# Altium PCB 主板-0909.PcbDoc (part 5 of 5)
Units mm, origin at the board's own origin, x right, y up, seen from the top; angles counter-clockwise.
Board outline 97.69 x 103.45 mm, 2 copper layers (Top Layer, Bottom Layer); 76 components, 70 nets, 245 pads, 271 vias.
Unrouted connection lines stored in the file: 5.
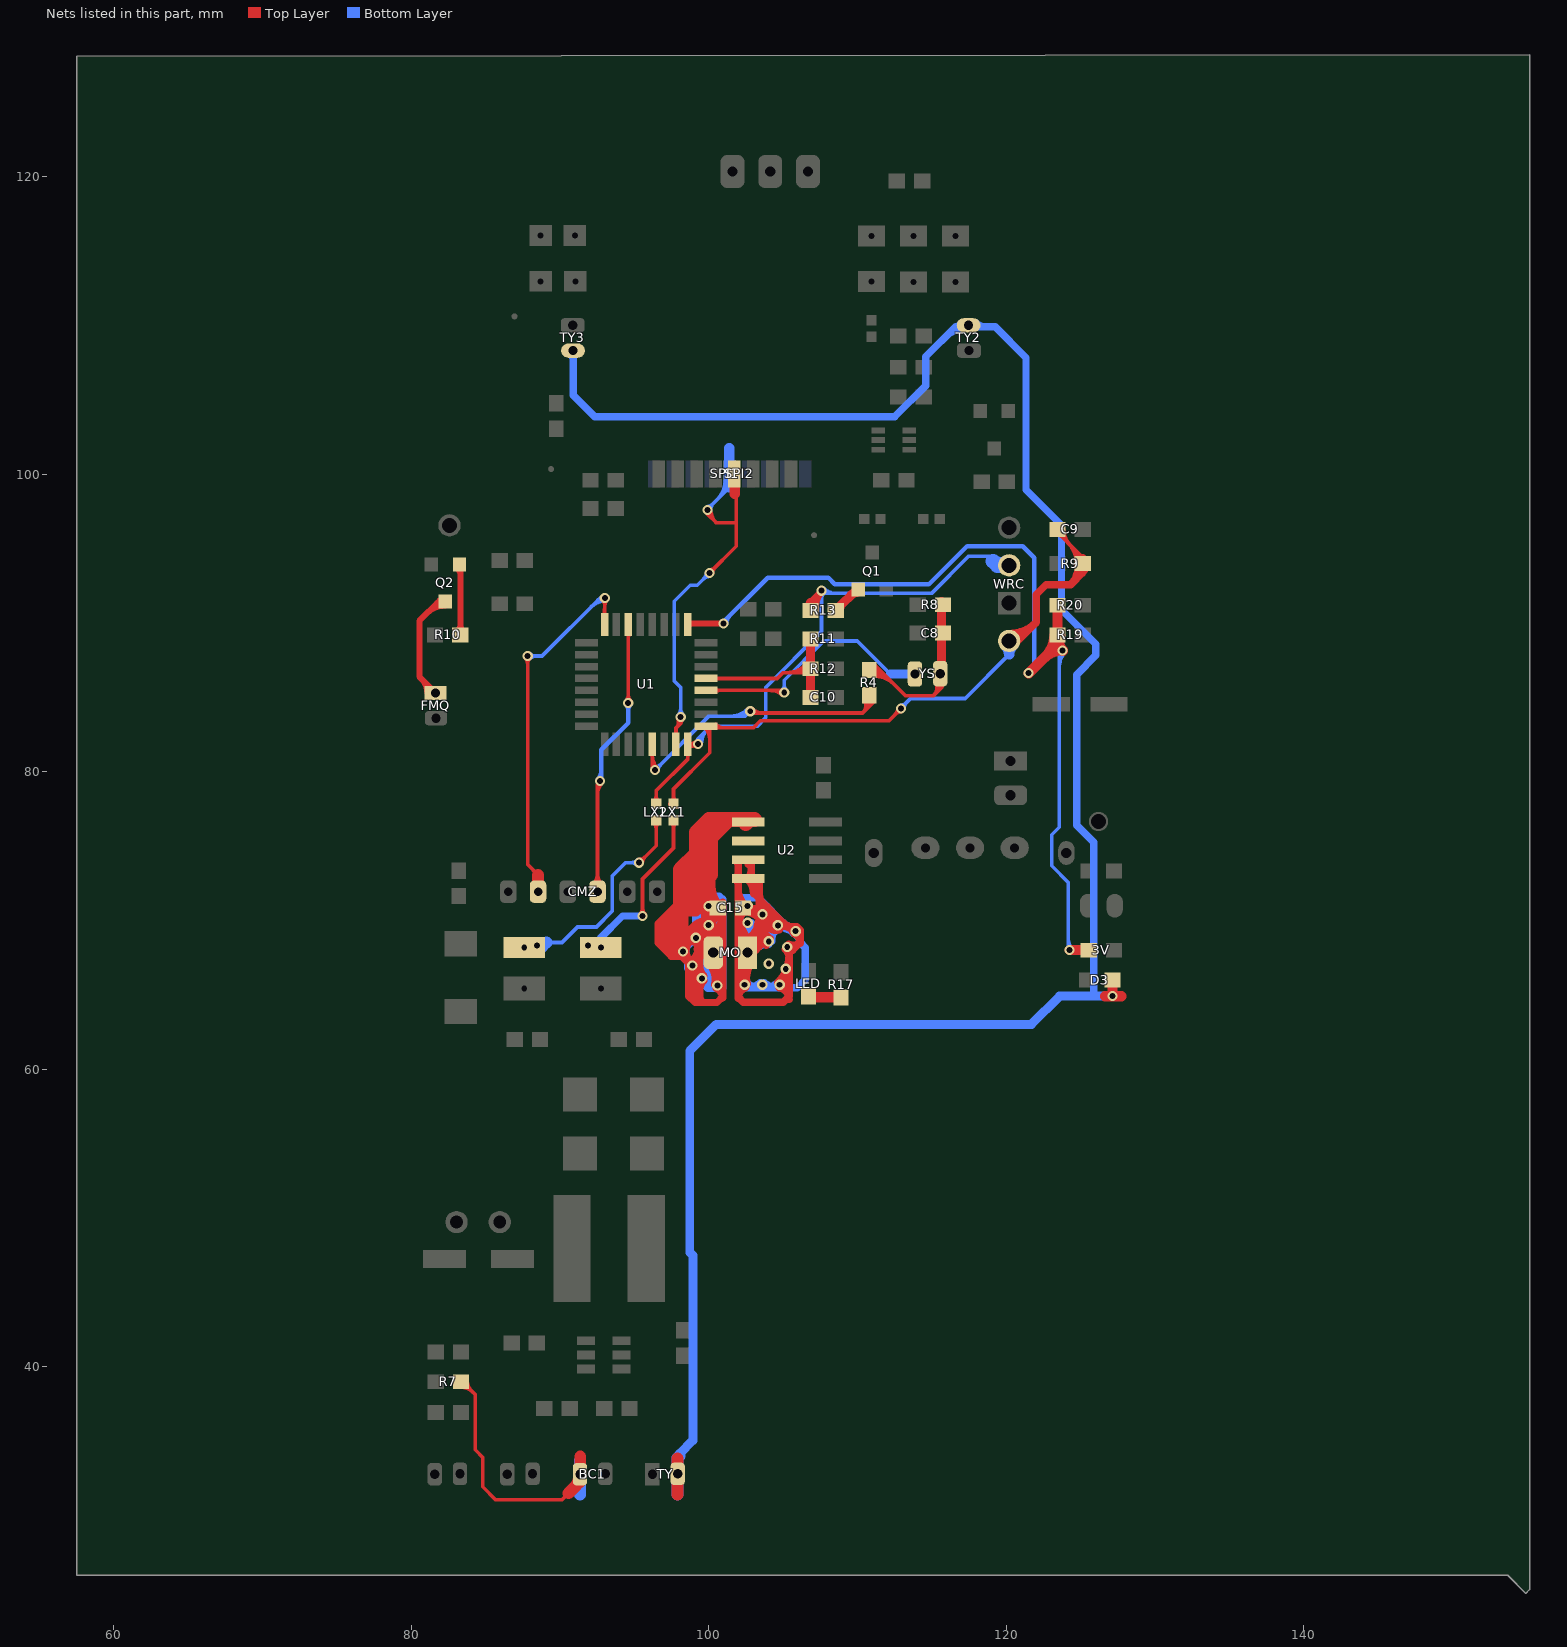
[diagram p5: the nets of this part, all layers, seen from the top]

## Via types
v1: diameter 0.7, hole 0.4, Top Layer to Bottom Layer, 113 vias
v2: diameter 0.68, hole 0.4, Top Layer to Bottom Layer, 89 vias
v3: diameter 0.8, hole 0.5, Top Layer to Bottom Layer, tented both sides, 22 vias
v4: diameter 0.6, hole 0.4, Top Layer to Bottom Layer, 8 vias
v5: diameter 0.9, hole 0.5, Top Layer to Bottom Layer, 8 vias
v6: diameter 0.8, hole 0.5, Top Layer to Bottom Layer, 8 vias
v7: diameter 0.65, hole 0.4, Top Layer to Bottom Layer, tented both sides, 6 vias
v8: diameter 1, hole 0.75, Top Layer to Bottom Layer, tented both sides, 5 vias
v9: diameter 0.8, hole 0.4, Top Layer to Bottom Layer, 2 vias
v10: diameter 1.1, hole 0.68, Top Layer to Bottom Layer, 2 vias
v11: diameter 1, hole 0.56, Top Layer to Bottom Layer, tented both sides, 2 vias
v12: diameter 1, hole 0.6, Top Layer to Bottom Layer, tented both sides, 2 vias
v13: diameter 0.9, hole 0.6, Top Layer to Bottom Layer, tented both sides, 1 vias
v14: diameter 0.95, hole 0.5, Top Layer to Bottom Layer, 1 vias
v15: diameter 0.7, hole 0.4, Top Layer to Bottom Layer, tented bottom, 1 vias
v16: diameter 1, hole 0.6, Top Layer to Bottom Layer, tented bottom, 1 vias

## Nets (pads, with @x,y where several pads share a name; then routed paths per layer and width w, separated by ;. In a path a pad name is that pad's centre, name@x,y a point inside that pad or via, vN(x,y) a via of type N, cw(c..) or ccw(c..) an arc to the next point about the centre after c; other vN are vias at no path point) (continued)
NetC4_1: C15.1 MO.2 U2.5 U2.6 | length 247.2
  Top Layer w0.254: 96.596,69.139 96.596,69.469 96.85,69.723 96.876,69.723 ; 97.027,68.758 ccw(c98.273,70.004) v1@98.273,68.243 ; 97.231,70.202 97.231,69.698 ; 97.461,68.325 ccw(c98.273,69.136) v1@98.273,67.989 ; 97.585,67.958 ccw(c97.585,68.607) v1@98.044,68.148 ; 97.587,68.072 96.876,68.783 ; v1@98.035,67.7 ccw(c97.447,67.157) 97.447,67.958 ; 96.876,68.783 96.774,68.885 96.596,68.885 96.596,68.809 97.447,67.958 ; 96.876,68.783 96.876,69.723 ; 96.876,69.723 97.206,69.723 ; 96.876,69.723 96.876,70.053 97.206,69.723 ; 97.079,69.367 97.231,69.52 97.231,69.647 ; 97.079,69.367 96.977,69.266 96.977,68.809 97.828,67.958 97.447,67.958 ; 97.079,69.367 97.561,69.367 97.257,69.672 ; 97.079,69.367 96.952,69.367 97.231,69.647 ; 97.206,69.723 97.231,69.698 ; 97.231,69.647 97.257,69.672 ; 97.231,69.647 97.231,69.698 ; 97.231,69.698 97.257,69.672
  Top Layer w0.5: 97.184,69.295 97.561,69.672 97.565,69.676 ; v1@97.968,67.818 v1@98.146,67.818 ; v1@98.091,68.003 cw(c97.485,68.281) 97.485,67.615 ; 98.091,70.202 97.024,70.202 ; 98.095,70.206 98.4,70.51 ; 98.095,70.507 98.098,70.51 98.4,70.51 ; 98.095,71.272 97.024,70.202 ; v1@98.119,68.047 cw(c97.739,68.361) 97.739,67.869 ; v1@98.134,68.064 ccw(c97.53,68.69) 98.4,68.69 ; v1@98.171,67.615 97.485,67.615 ; 98.179,68.301 98.4,68.301 98.4,68.69 ; v1@98.221,67.726 cw(c98.103,67.287) 98.497,67.514 ; 98.393,67.393 ccw(c98.908,67.908) v1@98.908,67.18 ; 98.458,67.581 cw(c97.857,66.98) v1@98.708,66.98 ; v1@98.465,67.864 ccw(c99.18,67.658) v1@98.654,67.132 ; v1@98.466,67.868 ccw(c98.959,67.736) 98.517,67.48 ; v1@98.473,67.92 ccw(c99.323,67.92) 98.722,67.318 ; 98.654,65.884 cw(c100.004,65.884) 99.049,66.838 ccw(c99.452,66.436) 98.882,66.436 ; v1@98.766,67.121 ccw(c97.26,68.628) v1@99.39,68.628 ; v1@98.842,66.791 cw(c98.697,66.376) 99.136,66.376 ; 98.882,65.029 cw(c99.799,65.029) v1@99.589,65.922 ; 98.882,65.661 cw(c99.65,65.661) v1@99.474,66.408 ; v1@98.995,68.693 cw(c98.04,67.738) 99.39,67.738 ; v1@99.02,68.671 cw(c98.691,68.209) 99.239,68.062 ; 99.028,66.529 ccw(c99.543,67.044) v1@99.543,66.316 ; v1@99.036,69.007 ccw(c98.427,70.062) 99.604,69.747 ; v1@99.079,66.877 ccw(c99.401,66.686) 99.136,66.421 ; v1@99.095,69.03 ccw(c99.019,69.393) 99.39,69.393 ; v1@99.115,69.033 ccw(c98.95,70.572) v1@100.266,69.757 ; v1@99.12,66.768 ccw(c98.467,67.421) 99.39,67.421 ; v1@99.12,67.192 cw(c98.467,66.539) 99.39,66.539 ; 99.136,64.927 cw(c100.405,64.927) v1@99.66,65.954 ; 99.136,65.908 cw(c99.694,65.908) v1@99.366,66.359 ; 99.136,65.945 ccw(c97.873,65.945) 98.766,66.838 cw(c97.26,65.332) 99.39,65.332 ; v1@99.168,68.536 ccw(c99.088,69.284) 99.727,68.888 ; v1@99.315,68.924 cw(c99.677,69.106) 99.39,69.393 ; v1@99.336,68.834 cw(c100.555,68.834) v1@99.693,69.696 ; 99.39,65.265 cw(c100.393,65.265) v1@99.684,65.975 ; 99.39,66.967 ccw(c100.393,66.967) v1@99.684,66.258 ; 99.39,67.743 cw(c101.954,67.743) v1@100.141,69.556 ; v1@99.39,68.95 cw(c100.747,68.95) v1@99.788,69.91 ; v1@99.502,66.312 cw(c99.42,66.705) 99.136,66.421 ; 99.597,70.946 cw(c100.217,70.325) C15.1@100.697,71.059 ; v1@99.93,69.51 ccw(c99.751,69.032) 99.39,69.393 ; 99.974,71.323 99.162,70.51 ; MO.2@100.075,67.108 cw(c97.988,65.021) 100.94,65.021 ; MO.2@100.075,68.573 ccw(c97.988,70.66) C15.1@100.94,70.66 ; v1@100.184,69.775 cw(c100.849,70.052) C15.1@100.225,70.412 ; v1@100.2,69.698 cw(c101.418,69.698) C15.1@100.557,70.559 ; 100.282,66.728 cw(c99.084,66.076) v1@100.392,65.69 ; C15.1@100.31,70.839 cw(c99.161,70.79) v1@99.974,69.977 ; C15.1@100.423,70.641 ccw(c99.873,69.799) 99.162,70.51 ; MO.2@100.429,67.461 cw(c99.195,66.228) 100.94,66.228 ; MO.2@100.429,68.22 ccw(c99.195,69.453) 100.94,69.453 ; v1@100.443,65.775 ccw(c99.243,66.975) MO.2@100.94,66.975 ; C15.1@100.483,70.673 cw(c99.381,69.571) 100.94,69.571 ; v1@100.506,65.45 cw(c100.226,64.793) 100.94,64.793 ; C15.1@100.65,70.653 v1@99.974,69.977 ; C15.1@100.94,71.245 100.94,64.872 100.559,64.491 99.644,64.491 ; 97.024,70.202 96.596,69.774 96.596,68.504 97.485,67.615 ; 97.739,67.869 97.917,67.869 ; 97.739,67.869 97.828,67.958 97.917,67.869 ; 97.917,67.869 98.294,67.492 ; 97.917,67.869 98.095,67.869 v1@98.146,67.818 ; v1@98.146,67.818 98.294,67.67 98.294,67.492 ; v1@98.146,67.818 98.222,67.818 98.882,67.158 v1@98.882,66.675 ; 98.294,67.492 v1@98.654,67.132 ; 98.4,68.69 98.4,70.51 ; 98.4,70.51 99.162,70.51 ; v1@98.654,66.904 v1@98.654,67.132 ; v1@98.654,66.904 98.654,64.922 99.085,64.491 99.644,64.491 ; v1@98.654,66.904 v1@98.882,66.675 ; v1@98.882,66.675 98.882,65.253 99.136,64.999 ; v1@98.882,66.675 99.136,66.421 ; 99.136,64.999 99.136,66.421 ; 99.136,64.999 99.39,64.745 ; 99.39,64.745 99.39,69.393 ; 99.39,64.745 99.644,64.491 ; 99.39,69.393 v1@99.974,69.977
  Top Layer w1: 97.561,69.672 97.561,68.918 98.095,68.385 ; 97.565,69.676 98.091,70.202 ; 98.098,70.51 98.505,70.917 98.628,70.917 98.984,71.272 98.984,73.863 99.162,74.041 99.974,73.228 ; 98.179,68.301 98.095,68.385 ; 98.211,68.501 cw(c99.136,67.575) v1@99.136,68.884 ; v1@98.223,67.92 cw(c99.654,67.92) 98.642,68.932 ; 99.074,69.364 cw(c100,68.439) v1@100,69.748 ; v1@99.149,68.882 cw(c98.868,67.812) MO.2@99.974,67.812 ; v1@99.154,68.787 ccw(c98.702,69.977) v1@99.974,69.977 ; v1@99.974,69.436 cw(c101.974,69.436) C15.1@100.56,70.85 ; v1@99.974,69.579 ccw(c101.646,69.579) MO.2@100.464,68.396 ; 99.974,71.323 v1@99.974,69.977 ; 99.974,71.425 99.974,73.228 ; 99.974,72.264 ccw(c101.974,72.264) C15.1@100.56,70.85 ; 99.974,75.082 99.974,73.228 ; v1@100.001,69.748 ccw(c99.961,68.535) 99.103,69.393 98.4,68.69 ; MO.2@100.533,67.691 99.974,68.25 v1@99.974,69.977 ; 101.346,76.784 100.127,75.565 100.127,73.076 99.974,73.228 ; U2.5@102.489,76.505 U2.5@102.768,76.784 ; U2.5@103.073,76.784 100.025,76.784 99.162,75.921 99.162,74.498 98.095,73.431 98.095,71.272 98.095,70.507 98.095,70.206 98.095,68.385 ; 98.095,68.385 98.4,68.69 ; 98.4,68.69 cw(c98.937,68.152) 99.15,68.882 ccw(c98.937,68.152) 98.4,68.69 ; 98.4,68.69 ccw(c98.929,68.16) 98.226,67.902 cw(c98.929,68.16) 98.4,68.69 ; C15.1@100.56,70.85 ccw(c101.211,69.799) 99.974,69.799 cw(c101.211,69.799) C15.1@100.56,70.85
  Bottom Layer w0.5: 98.318,68.295 cw(c99.136,67.477) v1@99.136,68.634 ; v1@98.445,68.128 cw(c99.355,67.603) v1@99.171,68.637 ; v1@98.461,67.853 ccw(c99.028,67.652) 98.603,67.227 ; 98.469,67.362 ccw(c98.908,67.801) v1@98.908,67.18 ; v1@98.473,67.92 cw(c99.753,67.92) v1@98.848,68.825 ; v1@98.646,66.833 ccw(c99.051,67.06) 99.195,66.619 ; 98.724,66.655 ccw(c99.543,67.474) 99.543,66.316 ccw(c99.543,67.106) 100.101,66.547 ; v1@99.011,68.561 ccw(c99.236,69.052) 99.703,68.782 ; v1@99.07,66.863 ccw(c99.291,66.703) 99.098,66.51 ; v1@99.081,66.881 ccw(c99.377,66.712) 99.136,66.472 99.098,66.51 ; v1@99.082,67.078 ccw(c99.593,67.364) 99.774,66.807 ; v1@99.105,66.945 ccw(c99.765,66.828) v1@99.429,66.248 ; v1@99.105,66.951 ccw(c100.281,66.779) v1@99.441,65.938 ; v1@99.107,68.535 ccw(c99.195,69.437) MO.2@99.835,68.796 ; v1@99.111,69.032 ccw(c98.986,70.005) v1@99.835,69.514 ; v1(99.136,68.834) 99.136,69.926 ; v1@99.136,69.034 ccw(c99.136,70.253) v1@99.998,69.391 ; v1@99.156,69.033 ccw(c99.328,70.802) 100.584,69.545 ; v1@99.181,69.159 cw(c100,68.34) v1@100,69.498 ; v1@99.253,66.037 cw(c99.883,66.209) 99.557,66.775 ; 99.293,70.201 99.2,70.294 ; v1@99.334,68.805 cw(c100.336,68.656) v1@99.829,69.533 ; v1@99.336,68.834 cw(c100.494,68.834) v1@99.675,69.652 ; v1@99.401,66.258 ccw(c98.753,66.906) 99.67,66.906 ; v1@99.443,68.836 ccw(c98.581,69.698) v1@99.8,69.698 ; v1@99.558,66.316 ccw(c99.607,66.94) 100.051,66.497 ; v1@99.67,65.875 cw(c100.869,65.875) MO.2@100.486,67.011 ; 99.67,66.571 cw(c100.634,66.571) MO.2@100.326,67.485 ; MO.2@99.67,67.267 cw(c100.4,67.267) MO.2@100.166,67.959 ; 99.724,68.943 ccw(c98.95,69.39) v1@99.808,69.641 ; v1@99.74,66.083 ccw(c100.478,65.96) 99.949,65.43 ; v1@99.81,69.635 cw(c98.761,69.286) 99.543,68.504 ; v1@99.858,69.556 cw(c98.107,67.804) MO.2@100.584,67.804 ; MO.2@99.897,67.906 cw(c100.723,68.595) v1@99.963,69.356 ; v1@99.903,69.523 cw(c99.139,68.141) MO.2@100.656,68.577 ; MO.2@99.974,68.18 ccw(c99.543,68.055) 99.543,68.504 ; v1@99.998,69.398 ccw(c100.002,69.997) 100.539,69.731 ; MO.2@100.029,68.063 ccw(c99.187,67.479) v1@99.187,68.504 ; v1@100.029,69.895 ccw(c100.15,70.716) 100.736,70.129 ; 100.051,65.683 cw(c102.066,65.683) MO.2@100.641,67.108 ; 100.051,66.446 cw(c100.635,66.446) MO.2@100.471,67.007 ; MO.2@100.064,67.12 cw(c99.733,66.815) 100.051,66.497 ; MO.2@100.077,68.575 ccw(c98.043,70.637) 100.94,70.637 ; MO.2@100.091,67.093 ccw(c99.886,66.865) MO.2@99.67,67.081 ; MO.2@100.11,67.077 cw(c99.334,66.096) 100.584,66.096 ; 100.115,69.076 ccw(c99.62,69.571) v1@100.284,69.792 ; MO.2@100.117,68.61 ccw(c99.413,69.545) 100.584,69.545 ; v1@100.2,69.698 cw(c101.357,69.698) 100.539,70.516 ; v1@100.212,69.91 cw(c99.314,69.011) 100.584,69.011 ; MO.2@100.281,68.226 cw(c101.145,68.947) 100.349,69.742 ; MO.2@100.34,66.991 ccw(c100.263,65.345) 99.098,66.51 ; v1@100.389,65.677 ccw(c99.44,65.886) 100.127,66.573 ; v1@100.403,65.719 cw(c99.949,65.932) 99.949,65.43 ; MO.2@100.428,68.219 ccw(c99.222,69.442) 100.94,69.442 ; MO.2@100.665,68.547 cw(c101.567,69.299) 100.736,70.129 ; 100.819,69.884 100.889,69.954 100.889,70.129 ; MO.2@100.94,66.975 cw(c99.243,66.975) v1@100.443,65.775 ; 98.603,67.227 97.968,67.862 97.968,67.945 100.66,70.637 100.94,70.637 ; 98.603,67.227 98.603,66.777 v1@99.441,65.938 ; 99.098,66.51 MO.2@99.67,67.081 ; 99.136,69.926 100.635,71.425 100.482,71.577 99.2,70.294 ; 99.136,69.926 99.136,70.231 ; 99.136,69.926 99.644,69.926 100.94,71.222 ; 99.136,70.231 99.2,70.294 ; 99.136,70.231 99.136,70.688 ; 99.136,70.688 99.136,70.968 99.822,71.653 100.101,71.653 ; 99.136,70.688 100.101,71.653 ; v1@99.187,68.504 99.543,68.504 ; v1@99.187,68.504 99.187,68.58 100.736,70.129 ; v1@99.441,65.938 99.441,66.243 99.657,66.027 99.67,66.04 MO.2@99.67,67.081 ; v1@99.441,65.938 99.949,65.43 ; 99.543,68.504 100.584,69.545 ; 99.949,65.43 100.051,65.43 ; 100.051,65.43 ccw(c100.051,65.785) 100.392,65.688 cw(c100.051,65.785) 100.051,65.43 ; 100.051,65.43 100.94,65.43 100.94,70.637 ; 100.051,65.43 100.051,66.497 ; 100.051,66.497 100.127,66.573 ; 100.101,71.653 100.508,71.653 ; 100.127,66.573 100.584,66.116 ; v1@100.443,65.775 ccw(c100.102,66.116) 100.584,66.116 ; v1@100.443,65.775 ccw(c100.101,66.116) 100.584,66.116 ; 100.508,71.653 100.711,71.653 100.94,71.425 100.94,71.222 ; 100.508,71.653 100.94,71.222 ; 100.584,66.116 ccw(c101.066,66.116) 100.725,65.775 cw(c101.067,66.116) 100.584,66.116 ; 100.584,66.116 100.584,69.545 ; 100.736,70.129 100.94,70.129 100.94,70.637 ; 100.94,70.637 100.94,71.222
  other v1: 100.584,65.634 99.543,66.116 98.908,66.98 98.273,67.92 100,69.698 100,70.968
NetC4_2: C15.2 MO.1 U2.7 U2.8 | length 165.7
  Top Layer w0.5: U2.8@101.819,72.782 cw(c101.427,72.39) 101.981,72.39 ; U2.8@101.819,72.852 ccw(c101.427,73.244) 101.981,73.244 ; U2.7@101.819,74.052 cw(c101.427,73.66) 101.981,73.66 ; U2.7@101.824,74.047 cw(c101.598,73.738) 101.981,73.738 ; 101.981,64.764 cw(c102.767,64.764) v1@102.485,65.498 ; 101.981,65.03 cw(c104.924,65.03) MO.1@102.843,67.111 ; 101.981,65.492 cw(c102.487,65.492) v1@102.305,65.964 ; 101.981,66.003 ccw(c102.731,66.003) v1@102.201,65.472 ; 101.981,66.237 cw(c103.716,66.237) MO.1@102.489,67.464 ; MO.1@101.981,67.21 ccw(c103.938,67.21) v1@102.554,65.826 ; 101.981,69.45 ccw(c103.716,69.45) MO.1@102.489,68.223 ; 101.981,69.573 cw(c103.537,69.573) C15.2@102.437,70.673 ; C15.2@101.981,70.657 ccw(c104.924,70.657) MO.1@102.843,68.576 ; 101.981,72.127 ccw(c103.537,72.127) C15.2@102.437,71.027 ; 101.981,73.762 101.981,64.872 102.337,64.516 105.004,64.516 105.41,64.922 105.41,67.996 105.639,67.996 106.172,68.529 ; C15.2@102.36,70.6 cw(c102.36,69.164) v1@103.375,70.179 ; MO.1@102.407,68.663 ccw(c101.794,70.151) v1@103.403,70.151 ; C15.2@102.537,71.027 ccw(c103.084,71.574) 103.084,70.8 ; MO.1@102.598,68.201 ccw(c102.102,69.404) 103.403,69.404 ; v1@102.605,65.74 cw(c104.105,66.169) MO.1@102.74,66.926 ; U2.8@102.619,72.782 cw(c101.656,71.812) 103.022,71.812 ; U2.8@102.619,72.852 ccw(c102.012,73.459) 102.87,73.459 ; U2.7@102.619,74.052 cw(c102.012,73.445) 102.87,73.445 ; U2.7@102.654,73.787 102.87,73.787 102.87,72.568 U2.8@103.022,72.568 ; MO.1@102.789,67.739 ccw(c102.41,68.657) 103.403,68.657 ; U2.8@103.022,72.695 U2.8@103.022,72.568 ; 103.174,70.381 ccw(c103.591,70.798) v1@103.932,70.316 ; 103.256,69.603 cw(c104.506,69.268) v1@103.859,70.388 ; 103.297,69.754 cw(c104.208,69.51) v1@103.838,70.377 ; 103.403,68.224 v1@103.403,70.151 ; 103.403,69.22 cw(c105.1,69.22) v1@103.9,70.42 ; 103.403,69.226 ccw(c104.445,69.226) v1@103.874,68.355 ; 103.403,71.501 103.022,71.882 U2.8@103.022,72.568 ; 103.403,71.903 ccw(c105.1,71.903) 103.9,70.703 ; v1@103.485,70.684 ccw(c103.995,70.455) 103.716,69.971 ; v1@103.511,70.73 ccw(c104.004,70.394) 103.582,69.972 ; v1@103.573,70.635 ccw(c102.866,70.913) 103.403,71.45 105.258,69.596 ; v1@103.612,70.425 ccw(c102.755,69.632) C15.2@102.755,70.8 ; v1@103.643,70.724 cw(c103.244,71.289) C15.2@102.755,70.8 ; v1@103.767,70.361 cw(c103.797,69.57) v1@104.483,69.966 ; v1@103.924,70.449 ccw(c104.513,70.048) 104.01,69.545 ; 103.929,70.924 cw(c102.677,69.672) 104.448,69.672 ccw(c103.904,69.672) 104.289,70.057 ; 103.959,70.561 ccw(c104.748,70.561) 104.19,70.003 ; 103.985,69.57 ccw(c104.513,70.098) v1@104.739,69.386 ; 104.09,70.103 ccw(c104.648,70.662) v1@104.648,69.872 ; 104.144,70.202 ccw(c103.759,69.817) 103.759,70.361 cw(c103.759,68.591) 105.011,69.843 ; v1@104.148,68.773 cw(c105.052,70.151) v1@103.403,70.151 ; v1@104.318,69.621 104.318,69.875 v1@103.48,70.714 ; v1@104.486,69.789 cw(c104.01,70.132) 104.01,69.545 ; v1@104.587,69.863 cw(c104.233,70.981) v1@103.403,70.151 ; v1@104.634,65.826 ccw(c102.759,67.7) 105.41,67.7 ; v1@104.741,65.487 cw(c104.603,64.693) 105.41,64.693 ; v1@104.789,69.814 ccw(c105.315,70.339) 105.315,69.596 ; v1@104.795,69.536 cw(c105.143,69.213) 105.38,69.624 ; v1@104.798,69.804 ccw(c105.258,70.207) 105.258,69.596 ; v1@104.826,65.98 cw(c104.706,65.286) 105.41,65.286 ; v1@104.987,65.472 ccw(c103.966,66.493) v1@105.41,66.493 ; 105.023,69.83 ccw(c105.842,70.649) v1@105.842,69.491 ; v1@105.142,68.083 cw(c104.494,67.435) 105.41,67.435 ; v1@105.374,68.403 ccw(c105.686,69.015) 106.172,68.529 ; v1@105.644,69.262 ccw(c105.258,69.206) 105.258,69.596 ; v1@105.758,69.11 cw(c105.457,68.461) 106.172,68.461 ; v1@105.775,69.48 cw(c105.608,69.947) 105.258,69.596 ; C15.2@102.755,70.8 v1@103.403,70.151 ; C15.2@102.755,70.8 103.393,70.8 103.403,70.79 ; U2.8@103.022,72.568 103.403,72.568 103.403,70.79 ; v1@103.403,70.151 103.403,70.714 ; v1@103.403,70.151 104.01,69.545 ; 103.403,70.714 v1@103.48,70.714 ; 103.403,70.714 103.403,70.79 ; 103.403,70.79 v1@103.48,70.714 ; v1@103.48,70.714 103.632,70.714 104.8,69.545 104.01,69.545 ; 105.258,69.596 105.918,69.596 106.172,69.342 106.172,68.529
  Bottom Layer w0.5: MO.1@102.083,66.964 ccw(c103.693,66.964) 102.554,65.826 ccw(c103.386,66.658) v1@103.386,65.481 ; 102.083,69.205 ccw(c103.471,69.205) MO.1@102.489,68.223 ; 102.083,70.412 ccw(c104.678,70.412) 102.843,68.576 cw(c103.39,69.124) 102.616,69.124 ; MO.1@102.277,68.576 ccw(c101.459,69.394) 102.616,69.394 ; MO.1@102.293,68.591 ccw(c101.148,69.869) 102.863,69.869 102.863,67.843 v1@104.616,69.596 ; MO.1@102.56,68.193 ccw(c102.56,69.771) 103.675,68.655 ; MO.1@102.56,68.693 ccw(c102.56,71.478) v1@104.529,69.509 ; MO.1@102.616,68.17 v1@102.616,69.571 ; v1@102.633,65.481 ccw(c102.633,66.658) v1@103.465,65.826 ; MO.1@102.992,67.972 cw(c104.038,66.926) v1@104.038,68.405 ; MO.1@103.081,68.312 cw(c103.648,67.33) v1@103.98,68.414 ; 103.532,70.757 ccw(c103.91,70.431) v1@103.557,70.078 ; v1@103.566,70.615 ccw(c102.667,70.866) 103.327,71.526 ; v1(103.621,70.416) cw(c102.919,69.68) 103.937,69.68 ; 103.632,69.772 cw(c104.548,69.772) 103.9,70.42 ccw(c104.364,69.956) 103.708,69.956 ; 103.632,69.939 cw(c104.188,69.939) v1@103.873,70.397 ; 103.708,70.025 cw(c104.206,70.025) v1@103.887,70.408 ; v1@103.741,68.566 cw(c104.324,68.643) 103.984,69.123 ; v1@103.748,65.826 ccw(c104.58,66.658) v1@104.58,65.481 ; v1@103.759,70.361 cw(c103.759,68.591) 105.011,69.843 ; v1@103.767,70.361 cw(c103.797,69.57) v1@104.483,69.966 ; v1@103.802,65.481 ccw(c103.802,66.658) v1@104.634,65.826 ; v1@103.91,70.43 ccw(c104.317,70.078) 103.937,69.698 ; 103.929,70.924 cw(c102.677,69.672) 104.448,69.672 cw(c103.858,69.672) 104.275,69.255 ; 103.959,70.561 ccw(c104.703,70.561) 104.177,70.035 ; 104.1,69.261 ccw(c103.718,69.921) v1@104.455,69.724 ; 104.122,70.09 ccw(c104.648,70.616) v1@104.648,69.872 ; v1@104.237,68.632 cw(c105.25,68.767) v1@104.659,69.601 ; v1@104.238,68.615 cw(c105.532,68.68) v1@104.616,69.596 ; 104.328,69.202 ccw(c103.898,69.559) v1@104.45,69.642 ; 104.403,69.227 ccw(c103.954,69.486) v1@104.455,69.62 ; 104.428,69.271 cw(c104.816,69.047) v1@104.7,69.479 ; v1@104.498,69.804 cw(c104.038,70.207) 104.038,69.596 ; v1@104.623,69.596 cw(c104.623,68.073) v1@105.7,69.15 ; v1@104.789,69.814 ccw(c105.315,70.339) 105.315,69.596 ; v1@104.795,69.536 cw(c105.143,69.213) 105.38,69.624 ; v1@104.821,69.772 ccw(c105.476,70.15) 105.28,69.42 ; v1@104.916,65.826 ccw(c105.748,66.658) 105.748,65.481 ; 105.023,69.83 ccw(c105.842,70.649) v1@105.842,69.491 ; v1@105.752,69.113 cw(c105.427,68.471) 106.147,68.471 ; v1@105.775,69.48 cw(c105.608,69.947) 105.258,69.596 ; 103.327,71.526 102.083,71.526 102.083,65.481 105.969,65.481 106.502,66.015 106.502,68.174 106.147,68.529 106.147,69.266 105.816,69.596 105.258,69.596 ; 103.327,71.526 105.258,69.596 ; 103.937,69.698 104.038,69.596 ; 103.937,69.698 103.708,69.926 103.708,70.028 103.632,69.952 103.632,69.494 103.759,69.367 103.937,69.545 103.937,69.698 ; 103.937,69.698 v1@103.937,70.275 ; v1@103.937,70.275 v1@104.616,69.596 ; v1@103.937,70.275 103.48,70.732 103.625,70.732 103.937,70.421 v1@103.937,70.275 ; 104.038,69.596 v1@104.616,69.596 ; v1@104.616,69.596 105.258,69.596 ; 105.258,69.596 cw(c105.258,70.207) 104.798,69.804 ccw(c105.258,70.207) 105.258,69.596 ; 105.258,69.596 cw(c105.258,69.206) 105.644,69.262 ccw(c105.258,69.206) 105.258,69.596
  other v1: 102.413,65.684 103.607,65.684 104.775,65.684 105.181,66.751 104.038,67.107 105.283,68.224 104.038,68.605 105.842,69.291 104.648,69.672 102.616,69.85 102.616,70.993
PB7: C10.1 R11.2 R12.2 U1.5 | length 14.3
  Top Layer w0.254: U1.5@99.825,86.277 104.616,86.277 105.003,86.664 106.85,86.664 R12.2@106.85,86.932 ; U1.5@100.437,86.19 cw(c100.647,85.98) 100.647,86.277 cw(c100.647,86.574) U1.5@100.437,86.364 ; 105.254,86.664 ccw(c105.254,88.478) R12.2@106.536,87.196 ; 105.867,86.664 ccw(c105.867,87.865) R12.2@106.716,87.016
  Top Layer w0.6: C10.1@106.85,84.932 R12.2@106.85,86.932 R11.2@106.85,88.932
Q1-B: Q1.1 R13.1 | length 3.3
  Top Layer w0.254: Q1.1@110.05,92.356 Q1.1@110.05,92.55
  Top Layer w0.6: R13.1@108.55,90.856 Q1.1@110.05,92.356 ; R13.1@108.8,90.856 cw(c109.404,90.856) R13.1@108.977,91.283 ; 109.571,91.876 cw(c110.05,91.397) Q1.1@110.05,92.075
Q2-C: FMQ.1 Q2.3 | length 10.6
  Top Layer w0.4: 80.697,86.244 cw(c79.758,85.305) FMQ.1@81.086,85.305 ; 81.042,90.654 cw(c82.3,89.396) Q2.3@82.3,91.175 ; FMQ.1@81.636,85.305 80.543,86.397 80.543,90.155 81.907,91.519 Q2.3@82.144,91.282 ; 81.725,91.337 cw(c82.3,90.761) Q2.3@82.3,91.575
R7: BC1.2 R7.2 | length 28
  Top Layer w0.254: R7.2@83.4,38.616 cw(c83.4,37.595) 84.122,38.317 ; R7.2@83.45,38.989 84.303,38.136 84.303,34.417 84.811,33.909 84.811,31.928 85.674,31.064 90.145,31.064 BC1.2@91.344,32.264 ; R7.2@83.773,38.989 ccw(c84.553,38.989) 84.001,38.438 ; 90.571,31.491 ccw(c89.558,32.504) BC1.2@90.991,32.504 ; 91.005,31.924 ccw(c90.425,32.504) BC1.2@91.245,32.504
  Top Layer w0.8: 90.576,31.496 91.344,32.264 BC1.2@91.344,32.774 ; 90.729,31.674 91.364,32.309 91.364,33.975 ; 91.037,31.957 ccw(c90.49,32.504) 91.264,32.504 cw(c90.551,32.504) 91.055,32
  Bottom Layer w0.254: BC1.2@91.111,32.239 cw(c90.66,31.725) 91.344,31.725 ; BC1.2@91.344,32.774 91.344,31.725 ; BC1.2@91.577,32.239 ccw(c92.028,31.725) 91.344,31.725
  Bottom Layer w0.8: 91.358,31.394 91.358,33.68
R10: 
R19: 3V.2 R19.2 R20.2 U1.9 | length 71.7
  Top Layer w0.4: U1.9@98.6,89.967 v2(100.99,89.967) v2@100.889,90.068 ; U1.9@98.635,89.867 cw(c98.876,89.626) 98.876,89.967
  Top Layer w0.7: v2@121.526,86.627 123.45,88.55 ; 122.559,87.66 cw(c123.8,86.419) v2@123.8,88.173 ; 122.649,87.75 ccw(c121.199,89.2) R19.2@123.25,89.2 ; 123.431,88.532 v2(123.8,88.163) cw(c124.401,88.765) R19.2@123.635,89.135 ; R19.2@123.45,88.983 ccw(c124.619,88.983) v2@123.793,88.156 ; R19.2@123.45,89 123.45,88.55 ; R19.2@123.45,89.2 R20.2@123.45,91.059 ; v2@123.798,88.153 cw(c123.85,88.55) 123.45,88.55 ; v2(124.257,68.021) 3V.2@125.413,68.021
  Bottom Layer w0.254: 123.571,87.097 cw(c124.866,87.097) v2@123.95,88.013 ; 123.571,87.697 cw(c123.825,87.697) v2@123.811,87.951 ; 123.571,87.71 cw(c124.253,87.71) v2@123.771,88.192 ; v2@123.613,88.06 cw(c123.391,87.937) 123.571,87.757 ; v2@123.8,87.986 123.571,87.757 ; 124.181,68.719 ccw(c124.955,68.719) v2@124.407,68.172 ; v2@124.258,68.023 124.181,68.101 124.181,72.568 123.063,73.685 123.063,75.768 123.571,76.276 123.571,87.757
  Bottom Layer w0.3: v2@100.889,89.967 103.962,93.04 108.052,93.04 108.483,92.608 114.808,92.608 117.373,95.174 121.107,95.174 121.895,94.386 121.895,87.02 v2(121.514,86.639) ; v2@101.18,89.967 cw(c101.884,89.967) 101.387,90.465 ; v2@121.514,86.829 ccw(c121.514,87.288) 121.838,86.964 ccw(c122.162,86.639) v2@121.704,86.639
R21: Q2.1 R10.1 | length 7
  Top Layer w0.254: Q2.1@83.094,93.782 Q2.1@83.312,93.564
  Top Layer w0.4: Q2.1@83.073,93.748 cw(c82.497,93.172) 83.312,93.172 ; R10.1@83.088,89.412 ccw(c82.547,89.953) 83.312,89.953 ; R10.1@83.312,89 Q2.1@83.312,93.564 ; 83.312,89.895 ccw(c83.995,89.895) R10.1@83.512,89.412 ; 83.312,93.471 cw(c83.704,93.471) Q2.1@83.427,93.748
RST: C9.2 LX1.1 LX1.2 pad.0@92.75,68.182 R9.1 U1.1 WRC.1 | length 72.5
  Top Layer w0.254: v2@95.404,70.458 ccw(c95.055,70.807) 95.549,70.807 ; v2@95.549,70.307 95.549,72.791 97.638,74.879 LX1.1@97.638,76.742 ; 95.549,70.836 ccw(c96.083,70.836) v2@95.705,70.458 ; LX1.2@97.4,77.842 97.638,78.08 97.638,78.842 100.076,81.28 100.076,82.925 U1.1@100.228,83.077 ; LX1.1@97.48,76.584 cw(c97.099,76.204) 97.638,76.204 cw(c98.176,76.204) LX1.1@97.795,76.584 ; LX1.2@97.48,78 ccw(c97.099,78.38) 97.638,78.38 ccw(c98.176,78.38) LX1.2@97.795,78 ; U1.1@99.738,82.99 cw(c98.922,82.175) 100.076,82.175 ; U1.1@99.918,83.17 cw(c99.535,82.788) 100.076,82.788 ; U1.1@99.977,83.122 100.143,82.956 102.997,82.956 103.47,83.429 103.773,83.429 103.783,83.439 112.116,83.439 v2(112.928,84.252) v2@112.878,84.252 ; U1.1@100.478,83.19 ccw(c101.041,83.753) 101.041,82.956 ; v2@112.715,84.252 cw(c112.201,84.252) 112.565,83.888 cw(c112.928,83.525) v2@112.928,84.039 ; C9.2@123.45,96.3 123.699,96.051 123.699,95.859 R9.1@125.15,94.408 ; C9.2@123.5,95.927 cw(c123.5,95.612) C9.2@123.723,95.835 ; C9.2@123.619,96.3 ccw(c124.492,96.3) 123.875,95.683 ; C9.2@123.873,96.3 ccw(c125.359,96.3) 124.308,95.249 ; 124.14,95.418 cw(c122.722,94) R9.1@124.727,94 ; 124.573,94.984 cw(c123.589,94) R9.1@124.981,94 ; 125.007,94.551 cw(c124.456,94) R9.1@125.235,94
  Top Layer w0.5: WRC.1@120.205,89.3 ccw(c120.228,91.837) 122.022,90.043 ; 121.179,89.2 cw(c120.213,90.167) WRC.1@120.2,88.8 120.779,88.8 122.022,90.043 ; R9.1@124.851,93.981 cw(c123.071,93.845) 124.333,92.583 ; R9.1@124.974,93.822 cw(c124.555,93.4) 125.15,93.4 ; 125.102,93.352 ccw(c124.501,93.954) R9.1@125.349,94.019 ; R9.1@125.15,94.408 125.15,93.4 ; R9.1@125.326,93.822 ccw(c125.745,93.4) 125.15,93.4 ; 122.022,90.043 122.022,91.923 122.682,92.583 124.333,92.583 ; 124.333,92.583 125.15,93.4
  Top Layer w0.7: pad.0@92.75,68.182 pad.0@93.337,68.182
  Bottom Layer w0.254: v2(112.928,84.252) 112.878,84.252 113.563,84.938 117.246,84.938 120.2,87.891 ; v2@112.928,84.465 ccw(c112.928,84.856) 113.205,84.579 ; v2@113.141,84.252 cw(c113.778,84.252) 113.328,84.702
  Bottom Layer w0.3: pad.0@92.75,68.182 pad.0@92.75,68.849
  Bottom Layer w0.5: pad.0@92.75,68.849 94.209,70.307 v2(95.555,70.307)
  Bottom Layer w0.7: WRC.1@119.93,88.505 cw(c119.368,87.891) 120.2,87.891 ; WRC.1@120.2,88.8 120.2,87.891 ; WRC.1@120.47,88.505 ccw(c121.032,87.891) 120.2,87.891
  other v9: 91.897,68.326
RT: 
SCK: SPI1.4 SPI2.4 U1.31 | length 42.1
  Top Layer w0.254: U1.31@97.713,82.464 ccw(c97.503,82.674) 97.8,82.674 ccw(c98.097,82.674) U1.31@97.887,82.464 ; U1.31@97.8,81.853 97.8,82.939 ; v2@97.925,83.607 cw(c97.375,83.365) 97.8,82.939 ; v2@97.99,83.524 cw(c97.785,83.259) 98.12,83.259 ; 98.063,83.202 ccw(c97.739,83.525) v2@98.158,83.71 ; v2(98.12,83.693) 98.12,83.259 ; v2@98.25,83.524 ccw(c98.455,83.259) 98.12,83.259 ; v2@99.876,97.405 cw(c99.811,97.122) 100.101,97.122 ; v2@99.883,97.612 ccw(c100.458,97.612) 100.051,97.205 ; v2(99.924,97.612) 99.924,97.333 100.508,96.749 101.854,96.749 ; v2@100.025,93.523 100.051,93.497 v2(100.051,93.358) 101.854,95.161 SPI1.4@101.854,100.406 ; v2@100.051,93.571 ccw(c100.051,94.085) 100.414,93.721 ccw(c100.778,93.358) v2@100.264,93.358 ; 100.101,97.155 v2@100.101,97.434 ; v2@100.137,97.612 ccw(c101.325,97.612) 100.485,96.772 ; SPI1.4@101.516,99.346 cw(c100.701,98.531) 101.854,98.531 ; SPI1.4@101.696,99.526 cw(c101.314,99.144) 101.854,99.144 cw(c102.14,99.144) SPI1.4@101.938,99.346 ; SPI1.4@101.727,100.032 SPI1.4@101.727,100.406 ; 97.8,82.939 98.12,83.259
  Top Layer w0.7: SPI1.4@101.727,100.406 SPI1.4@101.759,99.955 ; 101.752,98.679 SPI1.4@101.752,100.21
  Bottom Layer w0.254: v2@97.97,83.844 ccw(c97.606,84.207) 98.12,84.207 ccw(c98.634,84.207) v2@98.271,83.844 ; v2(98.12,83.693) 98.12,85.674 97.688,86.106 97.688,91.465 98.762,92.539 99.231,92.539 v2(100.051,93.358) v2@100.051,93.497 ; v2@99.838,93.358 cw(c99.323,93.358) 99.687,92.994 cw(c100.051,92.63) v2@100.051,93.145 ; v2@99.898,97.638 SPI2.4@101.397,99.136 ; v2@99.924,97.825 ccw(c99.924,98.217) 100.2,97.94 ; v2@100.137,97.612 cw(c100.773,97.612) 100.323,98.063 ; 100.613,98.353 ccw(c99.409,99.557) SPI2.4@101.112,99.557 ; 101.047,98.786 ccw(c100.276,99.557) SPI2.4@101.366,99.557
  Bottom Layer w0.7: SPI2.4@101.397,99.136 101.397,101.752
SWIM/BT: LX2.1 LX2.2 pad.0@87.6,68.182 R13.2 U1.32 WRC.3 | length 66.4
  Top Layer w0.254: v2(95.326,73.889) 96.469,75.032 LX2.1@96.469,76.742 ; v2@95.326,74.102 ccw(c95.326,74.616) 95.69,74.252 ccw(c96.053,73.889) v2@95.539,73.889 ; LX2.1@96.312,76.584 cw(c95.931,76.204) 96.469,76.204 cw(c97.008,76.204) LX2.1@96.627,76.584 ; LX2.2@96.312,78 ccw(c95.931,78.38) 96.469,78.38 ccw(c97.008,78.38) LX2.2@96.627,78 ; LX2.2@96.469,77.842 96.469,78.74 98.6,80.871 U1.32@98.6,81.852 ; U1.32@98.513,81.24 cw(c98.303,81.031) 98.6,81.031 cw(c98.897,81.031) U1.32@98.687,81.24 ; U1.32@98.687,81.765 cw(c98.925,81.527) 98.925,81.864 ; U1.32@98.687,81.939 ccw(c98.869,82.121) 98.869,81.864 ; U1.32@98.69,81.937 ccw(c98.857,82.093) 98.857,81.864 ; U1.32@98.701,81.783 cw(c98.857,81.675) 98.857,81.864 ; U1.32@98.832,81.839 cw(c99.11,81.561) v2@99.309,81.899 ; v2@99.12,81.735 ccw(c98.857,81.533) 98.857,81.864 ; v2@99.12,81.994 cw(c98.857,82.195) 98.857,81.864 ; v2@99.18,81.681 ccw(c98.937,81.27) 98.6,81.607 98.857,81.864 ; v2(99.289,81.864) 98.857,81.864
  Top Layer w0.5: R13.2@106.651,90.836 cw(c107.346,90.891) 106.853,91.384 ; 106.85,91.381 107.62,92.151 ccw(c108.768,91.003) R13.2@107.149,90.875
  Top Layer w0.6: R13.2@106.85,90.856 106.85,91.381
  Bottom Layer w0.254: 89.103,68.529 90.145,68.529 91.186,69.571 92.456,69.571 93.523,70.637 93.523,73 94.412,73.889 v2(95.326,73.889) ; v2@95.176,73.738 ccw(c94.812,73.374) 94.812,73.889 ccw(c94.812,74.403) v2@95.176,74.039 ; v2@99.188,82.052 ccw(c99.098,82.22) 99.289,82.22 ; v2@99.248,81.864 cw(c100.007,81.864) 99.47,82.401 ; v2(99.289,81.864) 99.289,82.22 ; v2@99.389,82.052 cw(c99.479,82.22) 99.289,82.22 ; v2@99.502,81.864 cw(c100.874,81.864) 99.904,82.835 ; v2@107.444,92.026 cw(c107.08,91.662) 107.594,91.662 cw(c108.109,91.662) v2@107.745,92.026 ; v2@107.565,92.148 ccw(c107.925,92.507) 107.925,91.999 ; v2@107.594,91.973 107.594,89.433 103.835,85.674 103.835,83.642 103.251,83.058 100.127,83.058 99.289,82.22 ; v2(107.594,92.177) 107.772,91.999 114.986,91.999 117.475,94.488 119.126,94.488 119.126,94.158 ; v2@107.745,92.327 ccw(c108.538,93.12) 108.538,91.999
  Bottom Layer w0.8: pad.0@87.6,68.182 87.968,68.182 cw(c88.341,67.81) v9(88.443,68.326) ccw(c88.581,69.051) 89.103,68.529 ; pad.0@87.986,68.199 88.773,68.199 88.809,68.235 pad.0@88.449,68.442
  Bottom Layer w1: WRC.3@120.054,94.083 cw(c119.634,94.666) 119.126,94.158 119.431,93.853 WRC.3@120.2,93.853
T-LED: LED.2 R17.1 | length 2.3
  Top Layer w0.7: LED.2@106.6,64.831 107.544,64.831 R17.1@108.9,64.831
TEMP: 
TY: D3.2 TY2.1 TY3.1 TY.1 | length 154
  Top Layer w0.7: 126.644,64.922 127.737,64.922 ; v2(127.15,64.92) D3.2@127.15,66
  Top Layer w0.8: 97.917,31.394 97.917,33.833
  Bottom Layer w0.5: TY3.1@90.719,108.156 cw(c90.326,107.764) 90.881,107.764 cw(c91.436,107.764) TY3.1@91.044,108.156 ; TY3.1@90.881,108.419 90.881,105.308 92.329,103.861 112.497,103.861 114.605,105.969 114.605,107.925 116.599,109.919 ; 115.984,109.304 cw(c117.155,108.133) TY2.1@117.155,109.789 ; TY2.1@116.953,110.129 cw(c116.599,110.322) 116.599,109.919 ; TY2.1@117.958,110.182 ccw(c118.591,110.815) 118.591,109.919 ; v2(127.15,64.92) 125.885,64.92 125.882,64.922 125.882,75.26 124.739,76.403 124.739,86.538 126.035,87.833 126.035,88.595 123.723,90.907 123.723,96.571 121.336,98.958 121.336,107.848 119.265,109.919 116.599,109.919
  Bottom Layer w0.6: 98.044,34.011 98.044,34.16 98.933,35.049 98.933,47.487 98.73,47.69 98.73,61.239 100.508,63.017 121.691,63.017 123.596,64.922 125.882,64.922 v2@127.15,64.922
  Bottom Layer w0.8: 97.917,31.42 97.917,33.884 98.044,34.011
Y30: CMZ.6 U1.16 | length 29.3
  Top Layer w0.254: v2@87.683,87.632 cw(c87.319,87.268) 87.833,87.268 cw(c88.347,87.268) v2@87.984,87.632 ; v2@87.833,87.96 87.833,73.762 88.53,73.065 ; v2@92.864,91.543 cw(c92.501,91.18) 93.015,91.18 cw(c93.529,91.18) v2@93.165,91.543 ; U1.16@92.913,90.514 ccw(c92.703,90.724) 93,90.724 ccw(c93.297,90.724) U1.16@93.087,90.514 ; U1.16@93,89.902 93,90.917 93.015,90.932 v2(93.015,91.694)
  Top Layer w0.8: CMZ.6@88.53,71.944 88.53,73.065
  Bottom Layer w0.254: v2(87.833,87.782) 88.798,87.782 92.71,91.694 v2(93.015,91.694) ; v2@87.984,87.632 cw(c88.347,87.268) 88.347,87.782 cw(c88.347,88.297) v2@87.984,87.933 ; 92.131,91.115 cw(c93.015,90.231) v2@93.015,91.481 ; 92.564,91.548 cw(c93.015,91.098) v2@93.015,91.735
Y30-D: 
Y>: CMZ.4 U1.14 | length 23.9
  Top Layer w0.254: CMZ.4@92.231,72.443 ccw(c91.509,73.165) 92.53,73.165 ccw(c93.551,73.165) CMZ.4@92.829,72.443 ; CMZ.4@92.53,71.944 92.53,79.124 v2@92.786,79.38 ; 92.53,78.485 cw(c93.583,78.485) v2@92.838,79.23 ; v2@94.439,84.783 ccw(c94.05,85.172) 94.6,85.172 ; U1.14@94.513,89.29 cw(c94.303,89.08) 94.6,89.08 cw(c94.897,89.08) U1.14@94.687,89.29 ; 94.6,85.122 ccw(c95.079,85.122) v2@94.74,84.783 ; U1.14@94.6,89.902 94.6,84.851 v2@94.793,84.658
  Bottom Layer w0.3: v2@92.553,79.515 ccw(c91.991,80.077) 92.786,80.077 ; v2@92.786,79.38 92.786,81.483 94.59,83.287 v2(94.59,84.633) ; v2@94.455,84.498 cw(c94.131,84.174) 94.59,84.174 cw(c95.048,84.174) v2@94.724,84.498
  other v2: 92.688,79.38
YS: C8.2 R4.1 R8.1 YS.1 | length 17.4
  Top Layer w0.254: R4.1@110.846,87.147 111.201,87.147 113.233,85.115 115.113,85.115 ; R4.1@111.2,86.427 cw(c111.2,84.685) 112.432,85.917 ; 111.328,86.817 111.133,86.736 111.735,86.487 ; YS.1@115.253,86.063 cw(c114.545,85.684) 115.113,85.115 ; 115.355,85.357 ccw(c114.86,85.852) YS.1@115.477,86.183 ; YS.1@115.483,85.886 cw(c115.43,85.658) 115.664,85.658 cw(c116.085,85.658) YS.1@115.802,85.969 ; 115.597,85.599 ccw(c115.175,86.021) YS.1@115.701,86.303 ; YS.1@115.664,86.075 115.664,85.667 115.113,85.115
  Top Layer w0.5: YS.1@115.401,87.133 ccw(c114.767,87.767) 115.664,87.767
  Top Layer w0.6: YS.1@115.664,86.6 R8.1@115.664,91.44
YS-U: R4.2 U1.29 | length 26.6
  Top Layer w0.254: U1.29@96.113,81.241 cw(c95.903,81.031) 96.2,81.031 cw(c96.497,81.031) U1.29@96.287,81.241 ; 96.2,80.478 ccw(c96.76,80.478) v2@96.364,80.083 ; U1.29@96.2,81.091 ccw(c97.373,81.091) v2@96.544,80.262 ; U1.29@96.2,81.853 96.2,80.304 v2(96.393,80.112) ; v2(102.794,84.074) 102.921,83.947 110.363,83.947 110.753,84.337 ; v2@102.944,84.225 ccw(c103.615,84.895) 103.615,83.947 ; 110.388,83.998 ccw(c109.945,84.441) R4.2@110.455,84.806 ; R4.2@110.649,84.969 cw(c110.636,84.734) R4.2@110.871,84.734 ; R4.2@110.8,85.15 110.8,84.574 110.563,84.337 110.753,84.337 ; R4.2@111.1,84.734 R4.2@111.125,84.709 ; R4.2@111.125,84.912 R4.2@111.125,84.709 ; 110.753,84.337 R4.2@111.125,84.709
  Bottom Layer w0.254: v2(96.393,80.112) 100.025,83.744 102.464,83.744 v2(102.794,84.074) ; v2@96.393,80.325 ccw(c96.393,80.839) 96.757,80.475 ccw(c97.12,80.112) v2@96.606,80.112 ; 101.482,83.744 ccw(c101.482,85.385) v2@102.643,84.225 ; 102.096,83.744 ccw(c102.096,84.772) v2@102.823,84.045
YS_D: U1.4 YS.2 | length 19.2
  Top Layer w0.254: U1.4@99.825,85.478 104.932,85.471 v2(105.081,85.321) ; U1.4@100.437,85.39 cw(c100.645,85.182) 100.645,85.476 ; U1.4@100.437,85.564 ccw(c100.649,85.776) 100.649,85.476 ; 104.205,85.472 cw(c104.204,84.445) v2@104.931,85.17
  Bottom Layer w0.254: v2@104.931,85.471 ccw(c104.567,85.835) 105.081,85.835 ccw(c105.596,85.835) v2@105.232,85.471 ; v2(105.081,85.321) 105.081,86.158 107.713,88.79 109.99,88.79 112.206,86.574
  Bottom Layer w0.6: 112.206,86.574 YS.2@113.996,86.574
ZFKZ: 
pads on no net: U4.6 U5.3
copper on no net:
  other v8: 93.294,44.069 93.37,45.466 93.37,46.914 93.37,48.412 93.37,49.86

## Polygon pours and split planes (outlines as drawn)
GND on Bottom Layer "Top Layer-No Net" (solid, remove dead copper, pour order 3): 90.808,111.432 85.957,111.432 85.957,99.953 85.978,99.931 85.922,99.875 83.29,99.875 82.672,99.875 80.028,97.231 80.013,97.216 80.013,62.461 80.013,62.131 80.623,61.521 80.851,61.292 84.56,61.292 84.56,60.937 85.906,59.591 86.134,59.362 86.134,55.171 85.804,55.171 84.077,53.444 83.747,53.774 80.546,53.774 80.267,53.774 79.937,53.444 79.962,53.418 79.962,52.021 84.356,52.021 85.601,50.777 85.83,50.548 85.83,46.586 85.83,45.214 85.601,44.986 85.042,44.427 84.636,44.427 80.597,44.427 80.343,44.681 80.064,44.401 80.064,43.97 80.064,31.532 80.028,31.496 80.038,31.486 80.038,30.762 80.165,30.762 80.445,30.482 80.673,30.254 80.902,30.254 81.271,30.254 81.304,30.221 98.352,30.221 98.929,30.221 99.088,30.381 99.571,30.863 99.571,30.889 99.571,31.445 99.628,31.502 99.628,60.125 99.628,60.562 100.612,61.546 101.146,62.08 101.222,62.08 121.337,62.08 121.359,62.102 121.432,62.029 121.771,62.029 121.872,62.029 122.482,61.419 122.634,61.267 122.634,60.734 122.634,58.93 122.812,58.752 122.812,58.117 122.863,58.117 123.32,57.66 123.498,57.482 123.955,57.482 124.311,57.482 124.412,57.381 126.774,57.381 127.511,57.381 128.121,57.99 128.529,58.398 128.529,59.417 128.529,96.998 127.15,98.376 125.454,98.376 123.879,99.951 123.792,99.865 122.34,99.865 122.34,99.97 122.278,100.031 122.228,100.082 122.228,111.432 115.319,111.432 115.268,111.483 115.294,111.457 115.294,105.006 115.268,105.006 113.947,103.685 113.795,103.533 93.856,103.533 92.84,103.533 92.053,104.32 90.808,105.565 90.808,107.089 90.808,111.051 91.164,111.407
GND on Top Layer "Top Layer-No Net" (hatched 90Degree grid 0.508 track 0.254, remove dead copper, pour order 6): 99.568,34.925 79.927,34.925 79.953,34.95 79.953,45.999 85.363,45.999 85.414,46.05 85.439,46.076 85.439,50.775 85.439,50.825 85.337,50.927 85.109,51.156 81.934,51.156 81.832,51.156 81.096,50.419 81.096,49.632 81.096,48.59 79.953,48.59 79.953,53.772 80.003,53.823 80.257,54.077 80.257,54.102 84.169,54.102 84.423,54.356 86.404,56.337 86.48,56.337 86.48,59.538 86.328,59.69 85.16,60.858 83.839,60.858 80.613,60.858 79.927,61.544 79.968,61.585 79.968,78.216 79.968,78.578 80.156,78.765 80.169,78.778 80.53,78.778 82.967,78.778 82.968,78.779 82.968,81.309 80.624,81.309 80.594,81.339 80.577,81.356 80.308,81.356 80.308,81.432 79.978,81.763 79.968,81.773 79.968,81.955 79.968,97.229 81.402,98.663 83.128,98.663 83.128,98.755 84.144,99.771 84.351,99.979 85.968,99.979 85.968,112.09 86.806,112.928 90.138,112.928 90.138,105.334 92.068,103.403 92.322,103.657 111.347,103.657 113.049,103.657 114.674,105.283 114.751,105.359 114.751,112.268 122.142,112.268 122.244,112.37 122.279,112.334 122.279,99.862 123.829,99.862 125.063,98.628 125.292,98.4 126.968,98.4 127.064,98.4 128.468,96.996 128.517,96.946 128.517,82.067 128.517,81.661 128.416,81.559 128.187,81.331 128.086,81.331 125.47,81.331 125.448,81.309 125.448,78.809 127.7,78.809 127.73,78.779 127.744,78.765 128.213,78.765 128.213,78.664 128.441,78.435 128.468,78.408 128.468,78.096 128.468,65.124 128.492,65.1 127.908,64.516 123.615,64.516 123.488,64.643 121.913,63.068 121.913,62.103 119.958,62.103 119.907,62.052 119.856,62.103 101.238,62.103 100.527,62.103 99.866,61.443 99.568,61.144 99.568,60.123 99.568,34.95
GND on Top Layer "Top Layer-No Net" (solid, remove dead copper, pour order 4): 98.73,77.641 98.73,78.95 100.885,81.096 100.885,82.045 101.147,82.307 103.326,82.307 103.801,82.78 105.693,82.78 105.717,82.804 105.788,82.734 105.788,81.997 105.721,81.997 104.675,80.955 104.292,80.574 104.292,77.47 103.788,77.972 99.762,77.972 99.43,77.641 98.73,77.641 98.73,78.865

## Keep-outs
Keep-Out Layer:
  circle w0.1: c125.775,60.079 r1.5
  circle w0.1: c89.13,119.579 r1.45
  circle w0.1: c119.262,119.579 r1.45
  circle w0.1: c82.557,57.679 r1.45
  lines w0.1: 80,58.793 80,78.216 cw(c80.562,78.216) 80.562,78.778 ; 80,59.154 80,31.494 ccw(c81.276,31.494) 81.276,30.218 98.326,30.218 ccw(c98.318,31.5) 99.6,31.5 99.6,60.123 cw(c101.577,60.123) 101.577,62.1 121.53,62.1 cw(c121.53,60.884) 122.746,60.884 122.746,59.436 ccw(c124.8,59.436) 124.8,57.382 ; 80,81.955 80,97.229 85.95,99.929 86,99.979 86,119.634 cw(c88.245,119.634) 88.245,121.879 ; 80.01,81.955 ccw(c80.626,81.955) 80.626,81.339 ; 80.562,78.779 83,78.779 ; 80.626,81.339 83,81.339 ; 83,78.809 83,81.309 ; 88.195,121.879 90.922,121.879 92.431,120.371 99.187,120.371 100.695,121.879 107.458,121.879 108.737,120.599 111.76,120.599 113.04,121.879 120.141,121.879 ; 94.25,66.232 86.1,66.232 86.1,67.462 94.25,67.462 ; 94.3,66.232 94.3,67.462 ; 119.941,121.879 cw(c119.941,119.57) 122.25,119.57 122.25,100.029 122.311,99.862 128.5,96.996 128.5,81.869 ; 124.8,57.382 126.467,57.382 ccw(c126.467,59.415) 128.5,59.415 128.5,78.096 ; 125.48,78.809 125.48,81.309 ; 125.495,78.779 127.787,78.779 ; 125.495,81.339 127.94,81.339 ccw(c127.94,81.899) 128.5,81.899 ; 127.787,78.779 cw(c127.787,78.066) 128.5,78.066 ; 87.757,113.673 87.757,115.333 91.825,115.333 91.825,113.673 87.757,113.673 ; 93.218,106.07 93.802,105.486 107.772,105.486 108.356,106.07 108.356,117.45 107.645,118.161 94.082,118.161 93.218,117.297 93.218,106.07 ; 109.728,113.673 109.728,115.333 118.085,115.333 118.085,113.673 109.728,113.673
  lines w0.15: 89.535,65.801 89.535,64.668 90.805,64.668

## Other copper
Top Layer:
  rectangle net NetC4_1: 98.4,67.054 100.046,70.714
  rectangle net NetC4_1: 99.314,64.694 100.635,69.139
  rectangle net NetC4_1: 100.178,64.872 101.194,76.835
  rectangle net NetC4_2: 105.08,68.047 105.943,69.596
  rectangle net NetC4_2: 103.53,64.491 105.181,69.825
  rectangle net NetC4_2: 102.108,64.516 103.759,74.143
  rectangle net 8.4V: 120.396,67.131 122.422,75.108
  rectangle net 8.4V: 120.345,73.406 122.174,75.514
  rectangle net BT: 121.488,76.759 122.453,78.867
  rectangle net BT: 115.087,65.938 118.059,73.203
  rectangle net BT: 113.817,72.542 117.983,77.14
  rectangle net GND: 106.248,80.493 118.415,82.525
  rectangle net GND: 118.262,80.01 123.977,82.88
  rectangle net BT: 106.985,76.759 121.641,78.765
  rectangle net NetC4_1: 100.635,75.082 103.149,76.632
  rectangle net BT: 114.122,63.83 118.085,66.116
  rectangle net GND: 86.563,36.373 88.951,38.622
  rectangle net GND: 87.249,38.658 89.75,40.615
  rectangle net 5V: 86.258,51.664 87.884,54.381
  rectangle net GND: 100.869,77.902 104.242,82.166
  rectangle net 5V: 89.764,42.367 91.008,45.009
  rectangle net GND: 94.183,31.4 96.723,34.849
Bottom Layer:
  rectangle net GND: 99.771,80.34 101.028,81.204
  rectangle net GND: 99.212,78.638 100.965,80.391
  rectangle net GND: 100.559,78.562 104.419,82.194
  rectangle net GND: 109.118,64.338 112.624,66.116
  rectangle net GND: 110.109,64.338 112.624,72.187
  rectangle net BT: 115.976,65.151 118.059,66.802
  rectangle net BT: 115.214,66.319 117.983,69.266
  rectangle net 8.4V: 120.675,66.396 121.818,67.488
  rectangle net 8.4V: 121.793,66.497 121.818,66.548
  rectangle net GND: 85.95,43.917 88.138,55.093
  rectangle net NetC4_1: 98.273,67.513 98.781,68.428
  rectangle net NetC4_1: 98.679,66.497 100.99,68.834
  rectangle net NetC4_1: 100.279,65.38 101.143,70.51
  rectangle net NetC4_2: 102.159,68.123 103.683,71.399
  rectangle net NetC4_2: 102.21,65.43 106.299,69.393
  rectangle net GND: 85.788,39.751 89.484,41.453
  rectangle net BT: 115.087,68.758 117.907,72.822
  rectangle net 8.4V: 119.583,67.029 122.301,74.447
  rectangle net 8.4V: 120.32,73.406 122.606,75.717
  rectangle net BT: 114.833,73.914 117.704,77.572
  rectangle net GND: 104.572,79.223 106.172,81.432
  rectangle net GND: 105.639,80.315 121.488,82.499
  rectangle net BT: 106.832,77.013 121.742,78.842
  rectangle net GND: 106.07,100.432 107.798,102.464
  rectangle net GND: 86.106,63.373 88.951,64.643
  rectangle net GND: 89.023,37.059 91.08,40.437
  rectangle net GND: 87.173,36.322 94.59,43.104
  rectangle net GND: 87.325,41.91 92.481,62.992
  rectangle net GND: 91.262,51.283 94.894,63.703
  rectangle net GND: 94.234,42.164 95.25,52.502
  rectangle net GND: 82.448,51.308 86.589,53.086
  rectangle net GND: 84.201,52.375 87.579,54.153
  rectangle net GND: 85.344,52.984 88.722,54.762

## Silkscreen, mask and mechanical layers (free items; w line width, h text height)
Top Overlay:
  circle w0.16: c125.175,84.532 r2.5
  circle w0.18: c84.556,47.346 r3.15
  lines w0.16: 105.156,63.144 105.17,63.158 ; 109.652,96.215 112.37,96.215 112.37,97.765 109.652,97.765 109.652,96.215 ; 110.236,108.534 110.236,111.074 111.658,111.074 111.658,108.534 110.236,108.534 ; 113.64,96.19 113.64,97.815 116.281,97.815 116.281,96.19 113.64,96.19
  lines w0.2: 94.894,102.006 94.894,105.08 ; 94.894,118.389 94.894,120.142 ; 107.29,101.776 107.29,105.029
  lines w0.22: 94.78,30.582 98.628,30.582 ; 117.096,63.629 120.5,63.629 ; 117.125,63.598 117.125,68.729 ; 117.125,68.727 111.121,68.727 111.121,76.116 123.999,76.116 ; 120.5,63.598 120.5,68.729 ; 120.525,68.729 123.973,68.727 123.973,76.116 ; 122.475,81.748 127.825,81.748 ; 122.475,81.823 122.475,85.95 123.778,87.253 ; 123.825,87.273 127.85,87.273 127.85,81.773 ; 127.85,81.779 127.875,81.804 ; 81.198,45.904 83.067,44.035 87.917,44.035 87.924,50.635 81.198,50.635 81.198,45.904
  text "G-" at 97.739,118.745 h1.3
  text "-R" at 108.331,118.72 h1.3
  text "BC2" at 92.227,117.145 h1 r90
  text "OUT1" at 87.3,116.281 h0.9 r90
  text "GND" at 119.482,113.335 h1 r90
  text "HWPOW" at 109.576,112.116 h0.9 r90
  text "BC1" at 87.376,111.938 h1 r90
  text "OUT2" at 93.066,111.785 h0.9 r90
  text "M1" at 92.354,99.314 h1.6
  text "GND" at 83.922,96.774 h1 r24
  text "CE" at 99.67,96.698 h0.9 r90
  text "IRQ" at 106.045,95.936 h0.9 r90
  text "GND" at 98.374,95.809 h0.9 r90
  text "3V3" at 97.079,95.783 h0.9 r90
  text "SCK" at 102.184,95.733 h0.9 r90
  text "CSN" at 100.889,95.656 h0.9 r90
  text "MOSI" at 103.429,95.148 h0.9 r90
  text "MISO" at 104.699,95.047 h0.9 r90
  text "SWIM/BTC" at 112.624,93.447 h0.8
  text "16" at 92.507,90.957 h0.7 r90
  text "RST" at 119.151,86.309 h0.8
  text "+" at 120.193,83.947 h1.8
  text "1" at 100.609,81.661 h0.8
  text "+" at 122.911,77.241 h2.5
  text "AM" at 90.957,73.889 h1 r90
  text "Y>" at 93.142,73.889 h1 r90
  text "Y30" at 89.103,73.812 h1 r90
  text "3.3V" at 87.02,73.787 h1 r90
  text "GN" at 97.028,73.762 h1 r90
  text "<Z" at 95.072,73.685 h1 r90
  text "SWIM" at 86.309,69.367 h0.8
  text "RST" at 91.796,69.291 h0.8
  text "TEMP" at 124.79,69.012 h0.8
  text "+" at 96.19,64.999 h2
  text "5V" at 89.383,62.941 h1
  text "+" at 92.024,62.433 h2
  text "-" at 86.665,62.306 h2.2
  text "+" at 80.594,43.459 h2
  text "+" at 99.187,34.823 h1.5 r90
Bottom Overlay:
  lines w0.16: 95.021,101.776 95.021,105.181 ; 96.19,95.301 96.19,93.32 96.317,93.193 105.029,93.193 105.105,93.269 105.105,95.199 ; 97.46,95.199 97.46,93.751 97.485,93.726 106.553,93.726 106.655,93.828 106.655,95.352 ; 98.6,70.028 98.6,63.119 104.369,63.119 104.369,69.875 104.521,70.028 98.628,70.028 ; 106.756,101.879 106.756,105.054
  lines w0.25: 96.063,101.956 96.063,105.029 ; 108.001,101.802 108.001,105.054
  text "-G" at 99.898,118.643 h1.2
  text "R-" at 110.211,118.567 h1.2
  text "HWPOW" at 109.576,116.713 h1 r90
  text "38BC2" at 91.999,116.662 h1
  text "GND" at 119.609,115.976 h1 r90
  text "38BC1" at 92.939,113.436 h1 r90
  text "38OUT" at 87.638,113.386 h1 r90
  text "FL" at 114.427,110.414 h1.2
  text "IRQ" at 98.019,98.222 h0.9 r90
  text "SCK" at 101.752,98.196 h0.9 r90
  text "GND" at 107.137,98.196 h0.9 r90
  text "CSN" at 103.073,98.171 h0.9 r90
  text "MISO" at 99.187,98.146 h0.9 r90
  text "MOSI" at 100.482,98.146 h0.9 r90
  text "CE" at 104.445,98.146 h0.9 r90
  text "GND" at 96.622,98.095 h0.9 r90
  text "3V3" at 105.664,98.095 h0.9 r90
  text "3.3" at 124.067,95.958 h1
  text "GND" at 83.058,95.021 h1 r90
  text "SWIM" at 125.171,93.447 h1
  text "GND" at 124.333,90.83 h1
  text "YS" at 116.18,88.494 h1.5
  text "RST" at 124.282,88.417 h1
  text "BT" at 121.056,84.557 h1.5 r90
  text "+" at 123.215,77.521 h2
  text "BT" at 116.967,73.304 h1.2 r90
  text "8.4V" at 121.133,73.254 h1 r90
  text "GND" at 125.654,72.568 h1 r270
  text "MO" at 102.692,70.815 h1.5
  text "201900901HFCC" at 80.772,64.922 h1 r270
  text "GND" at 86.004,64.11 h1.15 r180
  text "+" at 93.37,62.255 h2.2
  text "DC 5V" at 93.091,60.681 h1.2
  text "2000MA" at 93.701,58.699 h1.2
  text "B1" at 93.396,34.95 h1.2
  text "BH" at 88.57,34.874 h1.2
  text "TY" at 98.577,34.849 h1.2
  text "B2" at 83.464,34.747 h1.2
Top Solder:
  lines w0.7: 100.355,72.72 100.355,75.997 101.041,76.683 103.048,76.683
  lines w1: 102.26,75.616 102.26,76.505 ; 102.286,72.949 102.286,73.889 ; 116.482,66.246 116.482,68.732